# Altium PCB Arc.PcbDoc
Units mm, origin at the board's own origin, x right, y up, seen from the top; angles counter-clockwise.
Board outline 100 x 100 mm, 2 copper layers (Top Layer, Bottom Layer); 32 components, 11 nets, 78 pads, 10 vias.
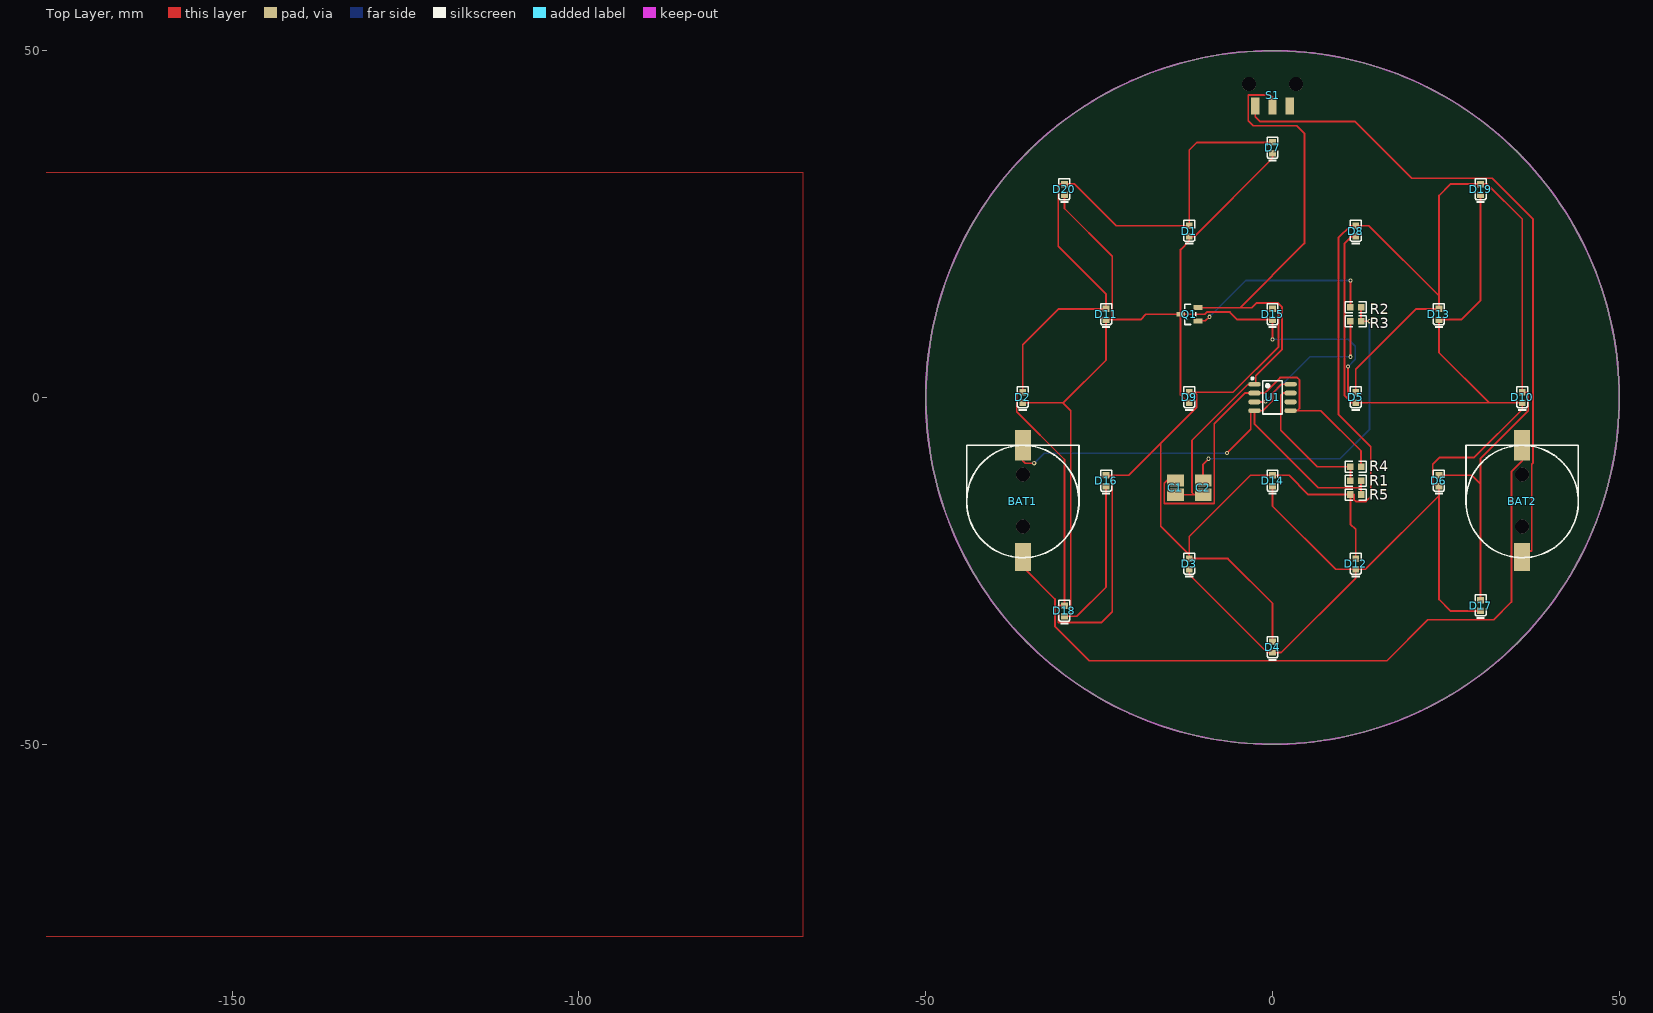
[diagram p0: Top Layer view]
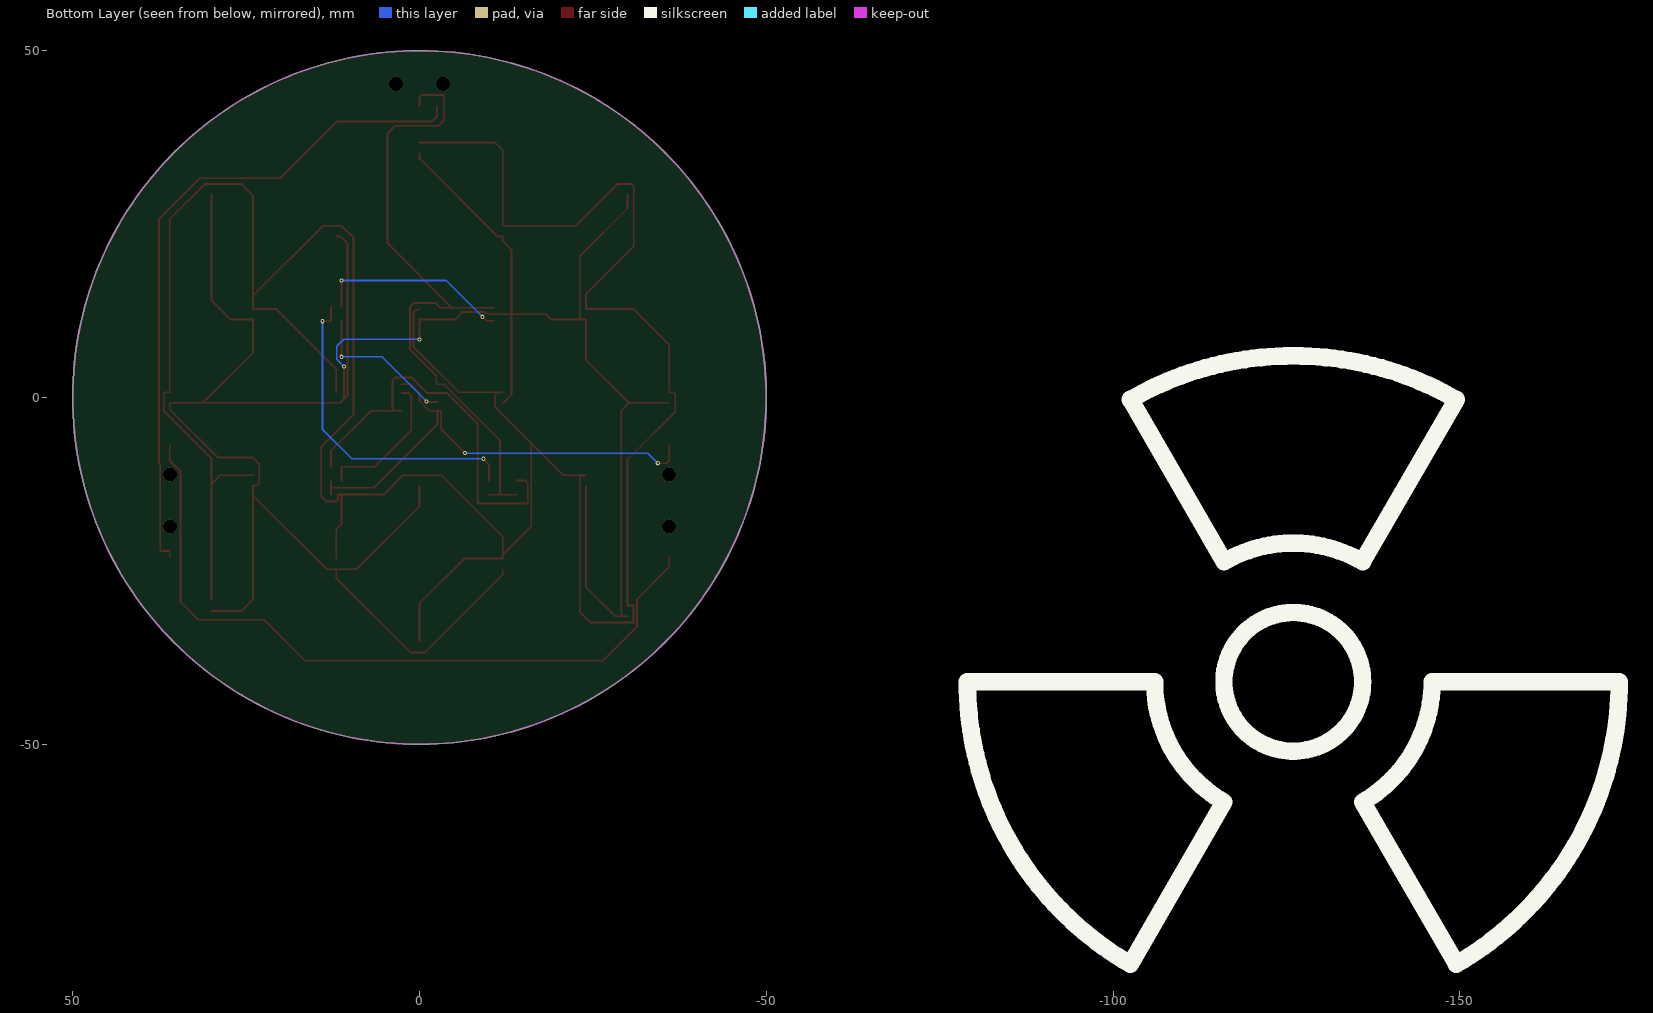
[diagram p1: Bottom Layer view, seen from below]
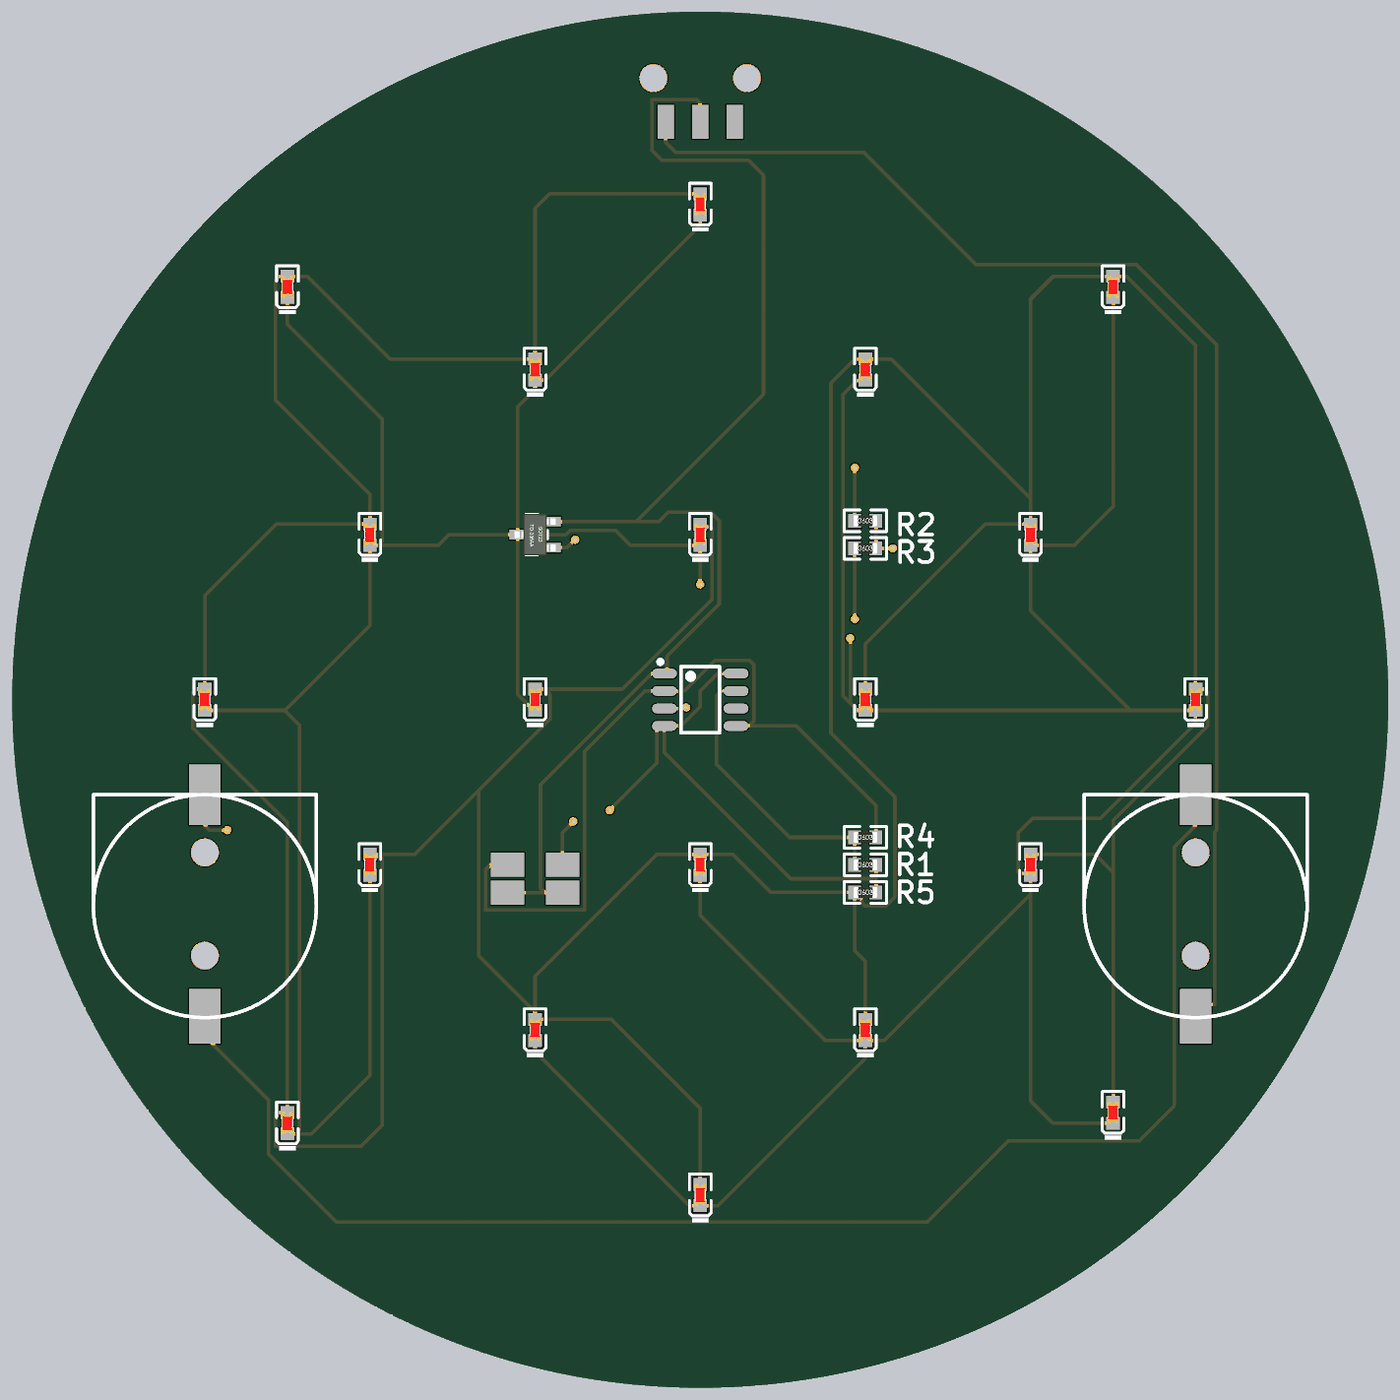
[diagram p2: 3D render of the assembled board from above, using the file's embedded part models]

## Layer stack, top to bottom
Top Solder: solder mask 0.0102, Solder Resist, Dk 3.5
Top Layer: signal copper 0.0356
Dielectric 1: dielectric 0.32, FR-4, Dk 4.8
Bottom Layer: signal copper 0.0356
Bottom Solder: solder mask 0.0102, Solder Resist, Dk 3.5

## Board outline
-50,0 ccw(c0,0) 0,-50 ccw(c0,0) 50,0 ccw(c0,0) 0,50 ccw(c0,0)

## Design rules (kind name [scope] priority, off if disabled: settings)
Clearance [All] p1: gap=0.254 ignorepadtopadclearanceinfootprint=FALSE except(0: Arc-Hole Track-Hole SMDPad-Hole THPad-Hole Via-Hole Fill-Hole Poly-Hole Region-Hole Text-Hole)
PolygonConnect [All] p1: connectstyle=Relief reliefconductorwidth=0.254 reliefentries=4 polygonreliefangle="90 Angle" airgapwidth=0.254
RoutingVias [All] p1: holewidth=0.3 width=0.6 viastyle="Through Hole" minholewidth=0.3 minwidth=0.6 maxholewidth=0.3 maxwidth=0.6
SolderMaskExpansion [All] p1: expansion=0.102
Width [All] p1: maxlimit=0.254 minlimit=0.254 preferedwidth=0.254
30 further rules are at their usual default settings.

## Components (designator, comment, footprint, x,y, rotation, side; value= is the part's Value field where it differs from the comment)
BAT1 "Power" CR1220_Dock -36,-15 r90 top
BAT2 "Power" CR1220_Dock 36,-15 r90 top
C1 "Cap" *CAPCP3528X210N -14,-13 r270 top
C2 "Cap" *CAPCP3528X210N -10,-13 r270 top
D1 "蓝灯 0603" 0603_LED_S1 -12,24 r90 top
D2 "蓝灯 0603" 0603_LED_S1 -36,0 r90 top
D3 "蓝灯 0603" 0603_LED_S1 -12,-24 r90 top
D4 "蓝灯 0603" 0603_LED_S1 0,-36 r90 top
D5 "蓝灯 0603" 0603_LED_S1 12,0 r90 top
D6 "蓝灯 0603" 0603_LED_S1 24,-12 r90 top
D7 "蓝灯 0603" 0603_LED_S1 0,36 r90 top
D8 "蓝灯 0603" 0603_LED_S1 12,24 r90 top
D9 "蓝灯 0603" 0603_LED_S1 -12,0 r90 top
D10 "蓝灯 0603" 0603_LED_S1 36,0 r90 top
D11 "蓝灯 0603" 0603_LED_S1 -24,12 r90 top
D12 "蓝灯 0603" 0603_LED_S1 12,-24 r90 top
D13 "蓝灯 0603" 0603_LED_S1 24,12 r90 top
D14 "蓝灯 0603" 0603_LED_S1 0,-12 r90 top
D15 "蓝灯 0603" 0603_LED_S1 0,12 r90 top
D16 "蓝灯 0603" 0603_LED_S1 -24,-12 r90 top
D17 "蓝灯 0603" 0603_LED_S1 30,-30 r90 top
D18 "蓝灯 0603" 0603_LED_S1 -30,-30.77 r90 top
D19 "蓝灯 0603" 0603_LED_S1 30,30 r90 top
D20 "蓝灯 0603" 0603_LED_S1 -30,30 r90 top
Q1 "SS8050 Y1" SOT-23(SOT-23-3) -12,12 r0 top
R1 "10KΩ (1002) ±1%" 0603_R 12,-12 r0 top
R2 "10KΩ (1002) ±1%" 0603_R 12,13 r0 top
R3 "47KΩ (4702) ±1%" 0603_R 12,11 r0 top
R4 "47KΩ (4702) ±1%" 0603_R 12,-10 r0 top
R5 "1.6k" 0603_R 12,-14 r0 top
S1 "SW-SPDT" sw_9*3.5*5.5mm 0,42 r0 top
U1 "NE555DR" SOIC-8_150mil 0,0 r270 top

## Footprints (in the part's own frame and the unit in brackets; to place one, negate y for a bottom-side part, rotate by r counter-clockwise, add the part's x,y. Pads: shape width x height; smd on the part's side, far side on the other; paste and mask are expansions set on the pad)
0603_LED_S1 [mm]
  rect 0.93x0.98 smd: A(0.77,0) K(-0.77,0)
  silkscreen extent -1.97,-0.79 1.54,0.79, body extent -0.8,-0.4 0.8,0.4, height 0.6
0603_R [mm]
  rect 0.93x0.98 smd: 1(-0.77,0) 2(0.77,0)
  silkscreen extent -1.53,-0.79 1.54,0.79, body extent -0.85,-0.4 0.85,0.4, height 0.56
*CAPCP3528X210N [mil]
  rect 69x95 smd: 1(-40,0) 2(40,0)
CR1220_Dock [mm]
  round 2 hole 2: 0(-3.6,0) 0(3.9,0)
  rect 4.4x2.3 smd mask+0.102: +(8.1,0)
  rect 4x2.3 smd mask+0.102: -(-8,0)
  silkscreen extent -8.1,-8.1 8.1,8.1
SOIC-8_150mil [mm]
  oval 0.7x1.8 smd: 1(-1.905,-2.6) 2(-0.635,-2.6) 3(0.635,-2.6) 4(1.905,-2.6) 5(1.905,2.6) 6(0.635,2.6) 7(-0.635,2.6) 8(-1.905,2.6)
  silkscreen extent -2.9,-3.05 2.4,1.4
SOT-23(SOT-23-3) [mm]
  rect 1.25x0.7 smd: 1(1.25,-0.95) 2(1.25,0.95) 3(-1.25,0)
  silkscreen extent -0.65,-1.46 0.9,1.46, body extent -1.5,-1.5 1.5,1.5, height 1.3
sw_9*3.5*5.5mm [mm]
  rect 1.2x2.45 smd: 1(-2.5,0) 2(0,0) 3(2.5,0)
  round 2 hole 2: 4(-3.4,3.175) 4(3.4,3.175)
  Top Layer pour cut-out: -1.5,7.9

## Part data
D1 D2 D3 D4 D5 D6 D7 D8 D9 D10 D11 D12 D13 D14 D15 D16 D17 D18 D19 D20: library part "0603 蓝灯", "发光二极管", Package=0603, SuppliersPartNumber=C72041, ComponentLink1Description=供应商, ComponentLink1URL=http://www.szlcsc.com/product/details_73150.html, Supplier=LC
Q1: library part "SOT-23 SS8050 Y1", "三极管", Package=SOT-23, SuppliersPartNumber=C2150, ComponentLink1Description=供应商, ComponentLink1URL=http://www.szlcsc.com/product/details_2507.html, Supplier=LC
R1 R2: library part "0603 10KΩ (1002) 1%", "贴片电阻", Package=0603, SuppliersPartNumber=C25804, ComponentLink1Description=供应商, ComponentLink1URL=http://www.szlcsc.com/product/details_26547.html, Supplier=LC
R3 R4: library part "0603 47KΩ (4702) 1%", "贴片电阻", Package=0603, SuppliersPartNumber=C25819, ComponentLink1Description=供应商, ComponentLink1URL=http://www.szlcsc.com/product/details_26562.html, Supplier=LC
R5: library part "0603 1.2KΩ (1201) 1%", "贴片电阻", Package=0603, SuppliersPartNumber=C22765, ComponentLink1Description=供应商, ComponentLink1URL=http://www.szlcsc.com/product/details_23492.html, Supplier=LC
S1: "SPDT Subminiature Toggle Switch, Right Angle Mounting, Vertical Actuation", ComponentLink1Description="Manufacturer Link", ComponentLink1URL=http://www.apem.com, DatasheetVersion=05-Dec-2000, LatestRevisionDate=17-Dec-2003, LatestRevisionNote="Schematic revised, PCB Footprint replaced.", PackageDescription="Switch; 4 Leads", PackageReference=TL36WW15050, Published=24-Mar-1999, Publisher="Altium Limited"
U1: library part NE555DR_[C7593], "时基集成", Package=SOIC-8_150mil, SuppliersPartNumber=C7593, ComponentLink1Description=供应商, ComponentLink1URL=http://www.szlcsc.com/product/details_8070.html, Supplier=LC

## Via types
v1: diameter 0.6, hole 0.3, Top Layer to Bottom Layer, 10 vias

## Nets (pads, with @x,y where several pads share a name; then routed paths per layer and width w, separated by ;. In a path a pad name is that pad's centre, name@x,y a point inside that pad or via, vN(x,y) a via of type N, cw(c..) or ccw(c..) an arc to the next point about the centre after c; other vN are vias at no path point)
NetBAT1_+: BAT1.+ R1.2 R5.2 U1.4 U1.8 | length 71.2
  Top Layer w0.254: BAT1.+ -36,-9.144 -35.67,-9.474 v1(-34.366,-9.474) ; v1(-6.579,-8.026) -3.15,-4.597 -3.15,-1.905 U1.4@-2.616,-1.905 ; U1.8 1.27,1.905 0,0.635 0,-0.508 -1.397,-1.905 U1.4 U1.4@-2.616,-1.905 ; R5.2 12.77,-12.7 ; R1.2 12.77,-12.7 ; U1.4@-2.616,-1.905 -2.616,-3.81 6.579,-13.005 12.465,-13.005 12.77,-12.7
  Bottom Layer w0.254: v1(-34.366,-9.474) -32.918,-8.026 v1(-6.579,-8.026)
NetBAT1_-: BAT1.- BAT2.+ | length 106.5
  Top Layer w0.254: BAT1.- -36,-24.435 -31.379,-29.056 -31.379,-33.01 -26.441,-37.948 16.51,-37.948 22.403,-32.055 31.877,-32.055 34.442,-29.489 34.442,-10.702 36,-9.144 BAT2.+
NetBAT2_-: BAT2.- S1.1 | length 97.9
  Top Layer w0.254: S1.1 -2.5,40.498 -1.778,39.776 11.913,39.776 20.073,31.616 31.706,31.616 37.541,25.781 37.541,-9.474 37.389,-9.627 37.389,-22.149 36,-22.149 BAT2.-
NetC1_+: C1.1 R4.2 U1.2 U1.5 | length 58
  Top Layer w0.254: C1.1 -15.24,-11.984 -15.596,-12.34 -15.596,-15.291 -8.407,-15.291 -8.407,-3.759 -4.013,0.635 U1.2 -1.143,0.635 1.092,2.87 3.556,2.87 3.886,2.54 3.886,-1.575 3.556,-1.905 ; U1.5 3.556,-1.905 ; R4.2 12.77,-7.715 6.96,-1.905 3.556,-1.905
NetC1__: C1.2 C2.2 Q1.2 S1.2 U1.1 | length 96.4
  Top Layer w0.254: C1.2 -11.308,-14.016 ; Q1.2 -4.674,12.95 ; C2.2 -11.308,-14.016 ; S1.2 0,43.358 -0.254,43.612 -3.505,43.612 -3.505,39.903 -2.794,39.192 3.505,39.192 4.597,38.1 4.597,22.221 -4.674,12.95 ; -11.308,-14.016 -11.608,-13.716 -11.608,-6.172 -3.531,1.905 U1.1 -2.413,1.905 -2.413,3.15 1.379,6.942 1.379,13.023 0.762,13.64 -2.286,13.64 -2.976,12.95 -4.674,12.95
NetC2_+: C2.1 R2.2 R3.2 | length 47.3
  Top Layer w0.254: C2.1 -10.008,-11.984 -10.008,-9.627 v1(-9.22,-8.839) ; R2.2 R3.2 v1(13.995,11)
  Bottom Layer w0.254: v1(-9.22,-8.839) 9.728,-8.839 13.995,-4.572 v1(13.995,11)
NetD1_A: D1.A D2.A D3.A D4.A D5.A D6.A D7.A D8.A D9.A D10.A D11.A D12.A D13.A D14.A D15.A D16.A D17.A D18.A D19.A D20.A R5.1 | length 450.5
  Top Layer w0.254: D9.A -11.311,0.77 ; D4.A 0,-29.667 -6.437,-23.23 D3.A -12,-22.682 ; D15.A 0.871,12.446 0.871,7.341 -5.7,0.77 -11.311,0.77 ; D7.A -10.922,36.77 -12,35.692 D1.A -22.524,24.77 -28.524,30.77 D20.A -30.596,30.77 -30.886,30.48 -30.886,21.796 -24,14.91 D11.A -30.836,12.77 -36,7.606 D2.A -36.619,0.77 -36.881,0.508 -36.881,-2.057 -30,-8.938 D18.A -30.871,-30 -30.871,-32.436 -24.638,-32.436 -23.114,-30.912 -23.114,-11.484 D16.A -20.755,-11.23 -16.104,-6.579 ; D12.A 12,-19.025 11.23,-18.255 R5.1 ; D5.A 12,4.044 20.726,12.77 D13.A 24,14.664 ; D6.A 28.702,-11.23 30,-12.528 ; D17.A 30,-12.528 ; -16.104,-6.579 -10.922,-1.397 -10.922,0.381 -11.311,0.77 ; -16.104,-6.579 -16.104,-18.579 -12,-22.682 ; -12,-22.682 -12,-20.052 -3.178,-11.23 D14.A 2.391,-11.23 5.161,-14 R5.1 ; R5.1 11.735,-14 11.735,-14.732 11.989,-14.986 13.462,-14.986 14.148,-14.3 14.148,-7.085 9.5,-2.437 9.5,23.012 11.257,24.77 D8.A 13.894,24.77 24,14.664 ; 24,14.664 24,29.116 25.654,30.77 D19.A 30.963,30.77 36,25.733 D10.A 36.652,0.77 36.881,0.541 36.881,-1.906 30,-8.787 30,-12.528
NetD1_K: D1.K D2.K D3.K D4.K D5.K D6.K D7.K D8.K D9.K D10.K D11.K D12.K D13.K D14.K D15.K D16.K D17.K D18.K D19.K D20.K Q1.3 | length 387.2
  Top Layer w0.254: D2.K -30.226,-0.77 ; D18.K -29.406,-31.54 ; D20.K -30,27.257 -23.114,20.371 -23.114,11.484 -23.368,11.23 ; D16.K -24,-27.321 -28.219,-31.54 -29.406,-31.54 ; D3.K -12,-25.532 -0.762,-36.77 D4.K 1.27,-36.77 12,-26.04 D12.K ; D9.K -12.133,-0.77 -13.259,0.356 Q1.3@-13.259,12 ; D14.K 0,-15.672 9.098,-24.77 D12.K ; v1(0,8.382) D15.K -5.058,11.23 -6.144,12.316 -9.465,12.316 -9.782,12 Q1.3 Q1.3@-13.259,12 ; D7.K 0,34.468 -11.238,23.23 D1.K -12,22.581 -13.259,21.322 Q1.3@-13.259,12 ; v1(10.897,4.47) 10.897,-0.237 ; D8.K 11.43,23.23 10.363,22.163 10.363,0.297 10.897,-0.237 ; D17.K 25.654,-30.77 24,-29.116 24,-14.156 ; D19.K 30,14.023 27.207,11.23 D13.K 24,6.477 31.247,-0.77 ; -30.226,-0.77 -30.18,-0.77 -24,5.41 D11.K -23.368,11.23 ; -30.226,-0.77 -29.108,-1.888 -29.108,-31.242 -29.406,-31.54 ; -23.368,11.23 -19.025,11.23 -18.255,12 Q1.3@-13.259,12 ; 10.897,-0.237 11.43,-0.77 D5.K 31.247,-0.77 ; D12.K 13.386,-24.77 24,-14.156 ; 24,-14.156 D6.K 23.114,-12.516 23.114,-9.652 24.13,-8.636 29.093,-8.636 36,-1.729 D10.K 31.247,-0.77
  Bottom Layer w0.254: v1(0,8.382) 10.897,8.382 11.913,7.366 11.913,5.486 v1(10.897,4.47)
NetQ1_1: Q1.1 R2.1 | length 28.3
  Top Layer w0.254: Q1.1 -9.676,11.05 v1(-9.093,11.633) ; R2.1 v1(11.23,16.866)
  Bottom Layer w0.254: v1(-9.093,11.633) -3.861,16.866 v1(11.23,16.866)
NetR1_1: R1.1 R4.1 U1.7 | length 20.8
  Top Layer w0.254: U1.7 1.524,0.635 1.194,0.305 1.194,-4.724 6.469,-10 R4.1 R1.1
NetR3_1: R3.1 U1.3 | length 21.7
  Top Layer w0.254: U1.3 -1.092,-0.635 v1(-1.016,-0.559) ; v1(11.23,5.867) R3.1
  Bottom Layer w0.254: v1(-1.016,-0.559) 5.41,5.867 v1(11.23,5.867)
pads on no net: BAT1.0 BAT2.0 S1.3 S1.4 U1.6

## Polygon pours and split planes (outlines as drawn)
NetBAT1_- on Top Layer "NETBAT1_-_L01_P000" (solid, remove dead copper, pour order 0): -180.89,35.687 -180.89,32.512 -67.733,32.512 -67.733,-77.724 -184.065,-77.724

## Keep-outs
Keep-Out Layer:
  circle w0.254: c0,0 r50

## Silkscreen, mask and mechanical layers (free items; w line width, h text height)
Bottom Overlay:
  circle w2.5: c-126,-41 r10
  lines w2.5: -173,-41 -146,-41 ccw(c-126,-41) -136,-58.321 -149.5,-81.703 ; -149.5,-0.297 -136,-23.679 cw(c-126,-41) -116,-23.679 -102.5,-0.297 ; -102.5,-81.703 -116,-58.321 ccw(c-126,-41) -106,-41 -79,-41
  lines w2.54: -173,-41 ccw(c-126,-41) -149.5,-81.703 ; -149.5,-0.297 cw(c-126,-41) -102.5,-0.297 ; -102.5,-81.703 ccw(c-126,-41) -79,-41